# EAGLE board ARABA 2.0 (EAGLE 9.7.0)

Size 320.68 x 221.55 mm. Coordinates in mm from the lower left corner, seen from the top.
Outline: 0,0 320.68,0 320.68,221.55 0,221.55 0,0
Copper layers (1*16): Top 0.035mm / dielectric 1.5mm / Bottom 0.035mm
Design rules "default": minimum track width 6mil, minimum drill 0.35mm, track to track 6mil, track to pad 6mil, pad to pad 6mil, via to via 6mil, smd to smd 6mil, copper to edge 40mil, drill to drill 6mil, minimum pad ring 10mil, minimum via ring 8mil, stop-mask expansion 4mil, vias tented up to drill 0mil, thermal gap 10mil

## Footprints (pad centres in the part's own frame; a part is rotated, then mirrored left to right if it is on the bottom)
CAPPRD254W65D500H1150B = drill 0.85 pad 1.45: 1 -1.27,0; 2 1.27,0
LEDRD254W60D565H860B_W = drill 0.981 pad 1.581: 1 -1.27,0; 2 1.27,0
HC-SR04 = drill 1.016 long: 1 -3.81,0; 2 -1.27,0; 3 1.27,0; 4 3.81,0
DG01D = drill 1.118 pad 3.15 octagon: + 2.54,0; - -2.54,0
BATTERY-GENERIC = drill 1.118 pad 3.15 octagon: + 2.54,0; - -2.54,0
PIEZO = drill 1 pad 1.6: 1 -3.5,0; 2 3.5,0
RESAD1016W63L850D250B = drill 0.83 pad 1.43: 1 -5.08,0; 2 5.08,0
DIP762W53P254L1969H508Q16B = drill 0.743 pad 1.343: 1 -3.81,8.89; 2 -3.81,6.35; 3 -3.81,3.81; 4 -3.81,1.27; 5 -3.81,-1.27; 6 -3.81,-3.81; 7 -3.81,-6.35; 8 -3.81,-8.89; 9 3.81,-8.89; 10 3.81,-6.35; 11 3.81,-3.81; 12 3.81,-1.27; 13 3.81,1.27; 14 3.81,3.81; 15 3.81,6.35; 16 3.81,8.89
ARDUINO-UNO-R3-SHIELD = drill 1.016 pad 1.88: 3.3V 24.13,-2.54; 5V 24.13,0; A0 24.13,12.7; A1 24.13,15.24; A2 24.13,17.78; A3 24.13,20.32; A4 24.13,22.86; A5 24.13,25.4; AREF -24.13,-13.97; D2 -24.13,20.32; D3 -24.13,17.78; D4 -24.13,15.24; D5 -24.13,12.7; D6 -24.13,10.16; D7 -24.13,7.62; D8 -24.13,3.81; D9 -24.13,1.27; D10 -24.13,-1.27; D11 -24.13,-3.81; D12 -24.13,-6.35; D13 -24.13,-8.89; GND@0 24.13,2.54; GND@1 24.13,5.08; GND@2 -24.13,-11.43; IOREF 24.13,-7.62; NC 24.13,-10.16; RES 24.13,-5.08; RX -24.13,25.4; SCL -24.13,-19.05; SDA -24.13,-16.51; TX -24.13,22.86; VIN 24.13,7.62

## Placement (x,y rotation side)
C1  700u  [CAPPRD254W65D500H1150B]  192.42,124.79 0 top
D1  WHITE  [LEDRD254W60D565H860B_W]  279.41,122.78 180 top
D2  WHITE  [LEDRD254W60D565H860B_W]  314.62,123.06 0 top
DIST1  DISTANCE-SENSOR-4PINHC-SR04  [HC-SR04]  234.6,195.52 270 top
MSAĞ1  MOTOR_DG01D  [DG01D]  143.2,99.68 180 top
MSAĞ2  MOTOR_DG01D  [DG01D]  143.54,36.02 180 top
MSOL2  MOTOR_DG01D  [DG01D]  12.7,35.51 180 top
MSOL_1  MOTOR_DG01D  [DG01D]  12.79,100.06 180 top
P1  BATTERYGENERIC  [BATTERY-GENERIC]  70.25,8.26 0 top
PIEZO1  PIEZO  [PIEZO]  213.76,69.21 180 top
RFAR_DIRENÇ  220  [RESAD1016W63L850D250B]  297.58,136.23 90 top
U1  L293E  [DIP762W53P254L1969H508Q16B]  84.43,54.59 180 top
U2  L293E  [DIP762W53P254L1969H508Q16B]  84.43,79.99 0 top
U3  ARDUINO-UNO-R3-SHIELD  [ARDUINO-UNO-R3-SHIELD]  97.52,177.93 90 top

## Library data of the parts
C1 DIST1 MSAĞ1 MSAĞ2 MSOL2 MSOL_1 P1 PIEZO1 RFAR_DIRENÇ U1-U3 = Tinkercad
D1 D2 = Tinkercad; CATEGORY: Opto-Electronic; SUB-CATEGORY: LED; VALUE: LED_WHITE

## Nets
D1_A: D1.1 D2.1 RFAR_DIRENÇ.1
MSAĞ1_+: MSAĞ1.+ MSAĞ2.+ U2.3
MSAĞ2_-: MSAĞ1.- MSAĞ2.- U2.6
MSOL2_-: MSOL2.- MSOL_1.- U1.14
MSOL_1_+: MSOL2.+ MSOL_1.+ U1.11
P1+: P1.+ U1.16 U2.8 U3.VIN
P1-: C1.2 D1.2 D2.2 DIST1.4 P1.- PIEZO1.2 U1.4 U1.5 U1.12 U1.13 U2.4 U2.5 U2.12 U2.13 U3.GND@0 U3.GND@1 U3.GND@2
U3_5V: C1.1 DIST1.1 U1.9 U2.1 U2.16 U3.5V
U3_A4: PIEZO1.1 U3.A4
U3_A5: RFAR_DIRENÇ.2 U3.A5
U3_D2: DIST1.2 U3.D2
U3_D3: U2.2 U3.D3
U3_D4: DIST1.3 U3.D4
U3_D5: U2.7 U3.D5
U3_D6: U1.10 U3.D6
U3_D9: U1.15 U3.D9

## Tracks (layer width: path | path; a pad name or v marks a point on that pad's centre or on a via)
D1_A  (2 unrouted)
MSAĞ1_+  (2 unrouted)
MSAĞ2_-  (2 unrouted)
MSOL2_-  (2 unrouted)
MSOL_1_+  (2 unrouted)
P1+  (3 unrouted)
P1-  (16 unrouted)
U3_5V  (5 unrouted)
U3_A4  (1 unrouted)
U3_A5  (1 unrouted)
U3_D2  (1 unrouted)
U3_D3  (1 unrouted)
U3_D4  (1 unrouted)
U3_D5  (1 unrouted)
U3_D6  (1 unrouted)
U3_D9  (1 unrouted)